# Altium PCB Main Control Board.PcbDoc
Units mil, origin at the board's own origin, x right, y up, seen from the top; angles counter-clockwise.
Board outline 1505 x 1885 mil, 2 copper layers (Top Layer, Bottom Layer); 17 components, 17 nets, 68 pads, 2 vias.
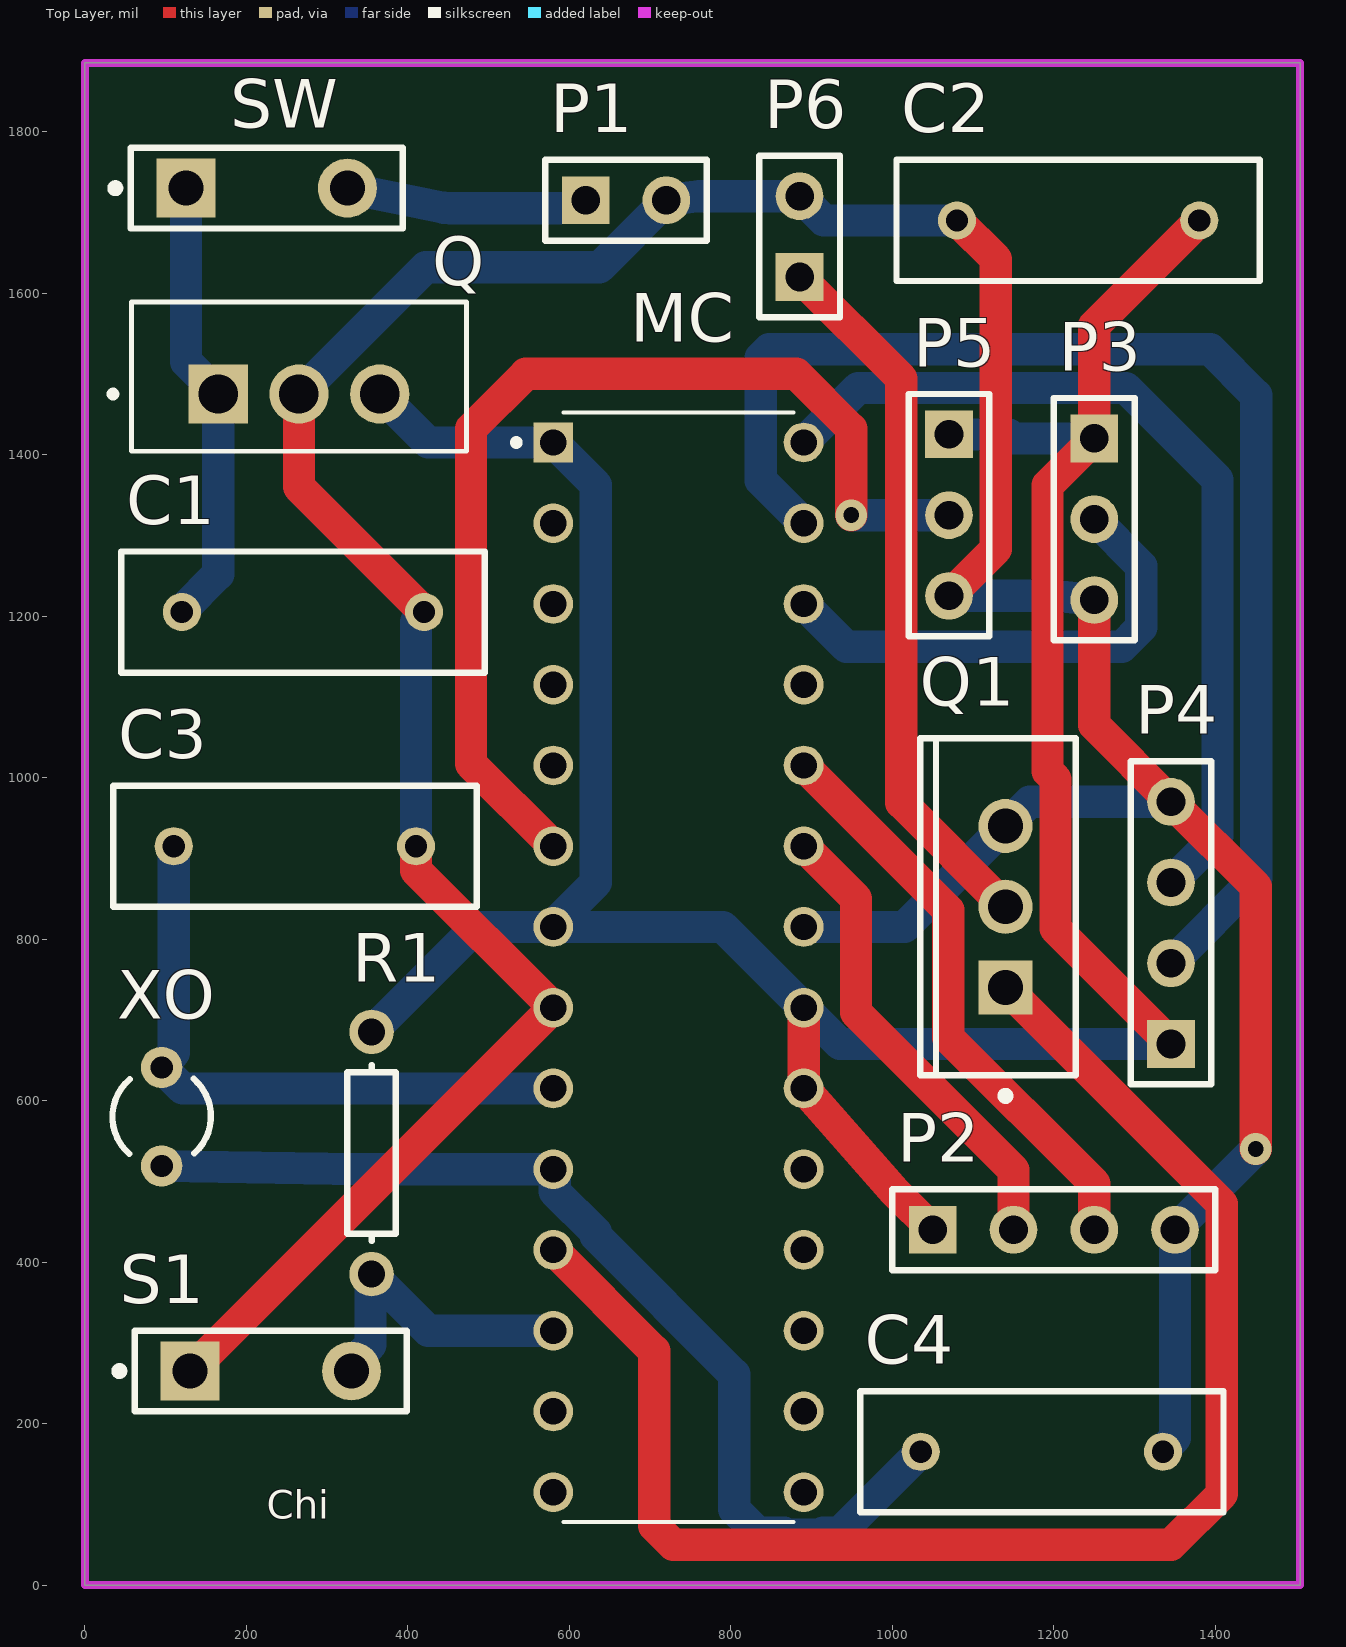
[diagram p0: Top Layer view]
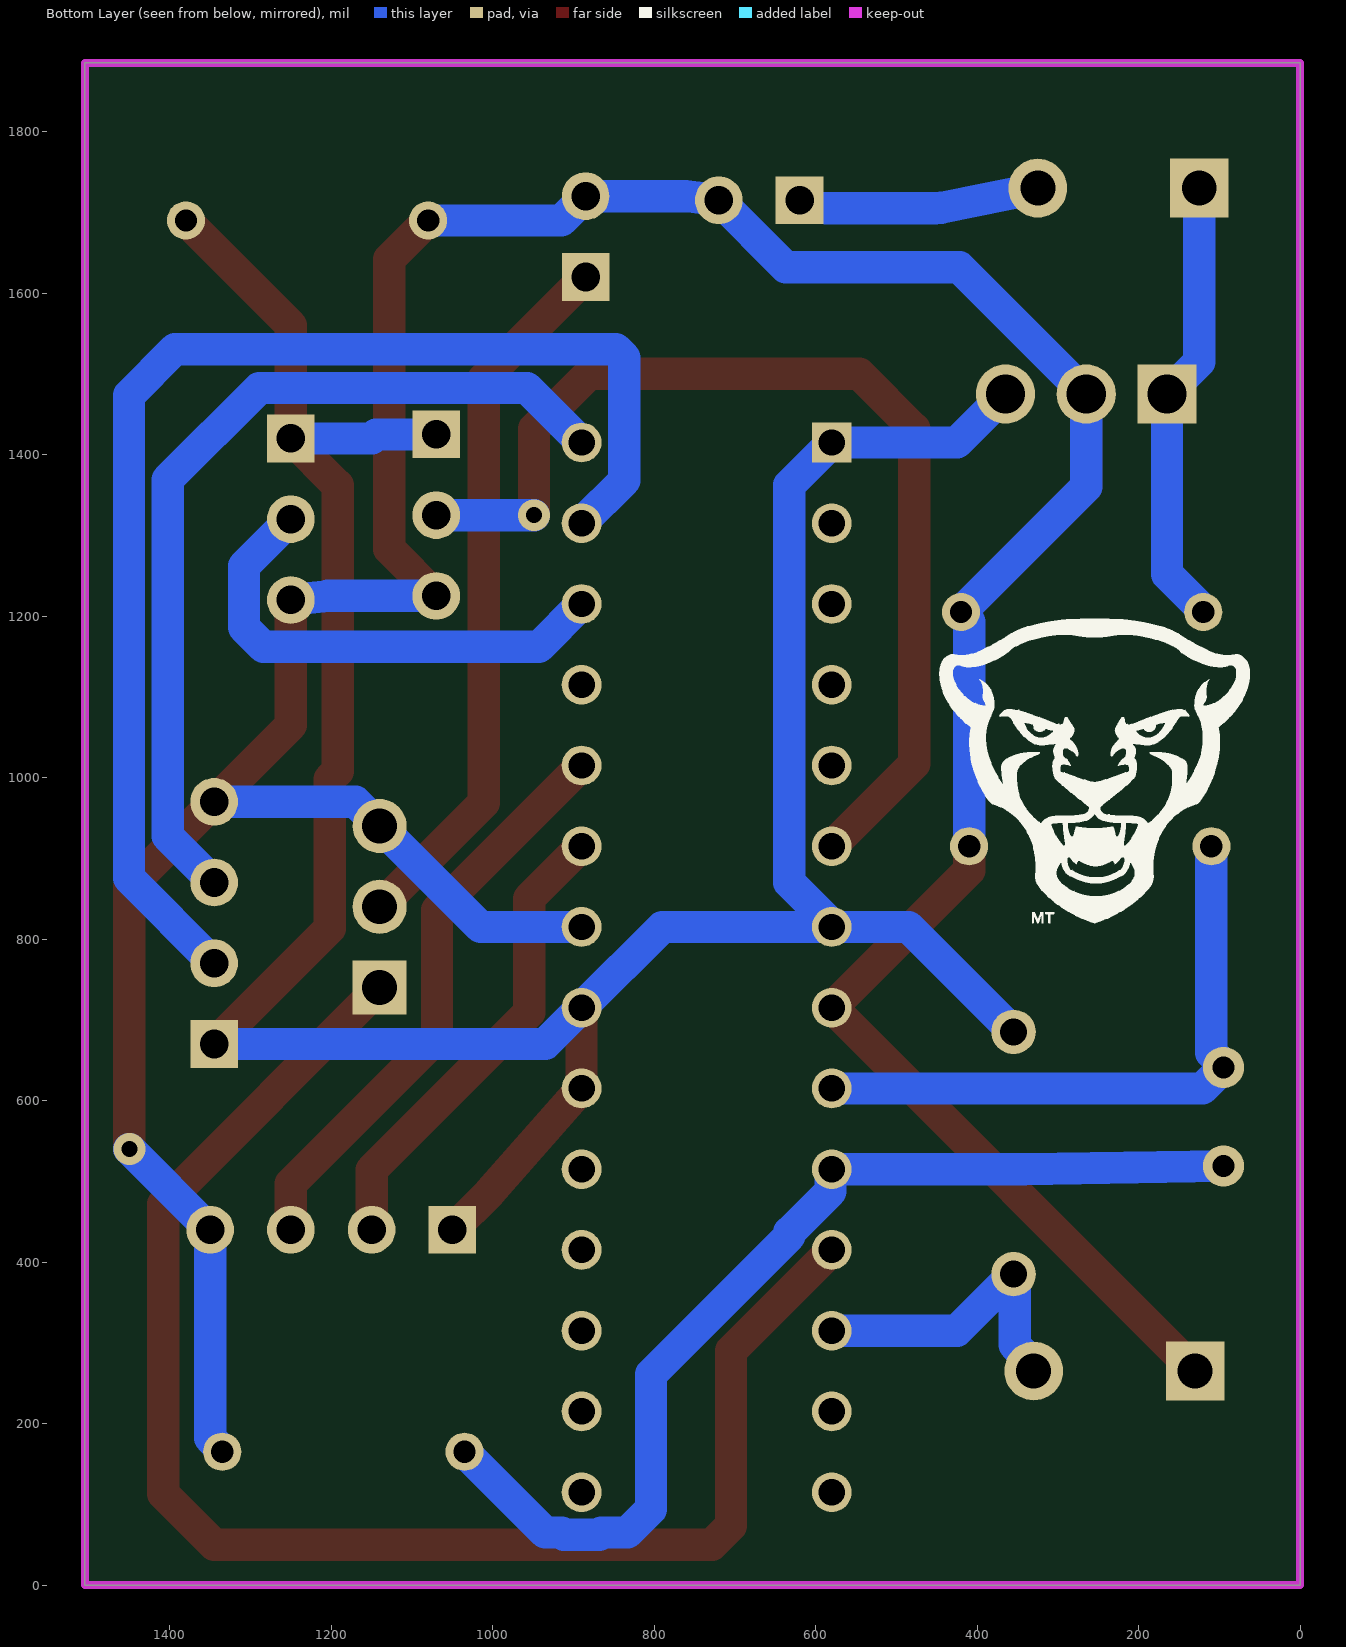
[diagram p1: Bottom Layer view, seen from below]

## Layer stack, top to bottom
Top Solder: solder mask 0.4, Solder Resist, Dk 3.5
Top Layer: signal copper 1.4
Dielectric 1: dielectric 12.6, FR-4, Dk 4.8
Bottom Layer: signal copper 1.4
Bottom Solder: solder mask 0.4, Solder Resist, Dk 3.5

## Board outline
0,0 1505,0 1505,1885 0,1885

## Design rules (kind name [scope] priority, off if disabled: settings)
BoardOutlineClearance [All] p1: gap=7.87 ignorepadtopadclearanceinfootprint=FALSE except(15.75: Arc-SplitBarrior Arc-SplitContinuation Track-SplitBarrior Track-SplitContinuation SMDPad-SplitBarrior SMDPad-SplitContinuation THPad-SplitBarrior THPad-SplitContinuation Via-SplitBarrior Via-SplitContinuation Fill-SplitBarrior Fill-SplitContinuation Poly-SplitBarrior Poly-SplitContinuation Region-SplitBarrior Region-SplitContinuation Text-SplitBarrior Text-SplitContinuation)
Clearance "Clearance Bottom Layer" [OnLayer('Bottom Layer')] p1: gap=8 ignorepadtopadclearanceinfootprint=TRUE except(10: Arc-Text Track-Text SMDPad-Text THPad-Text Via-Text Fill-Text Poly-Text Region-Text Text-Text)
Clearance "Clearance Top Layer" [OnLayer('Top Layer')] p2: gap=8 ignorepadtopadclearanceinfootprint=TRUE except(10: Arc-Text Track-Text SMDPad-Text THPad-Text Via-Text Fill-Text Poly-Text Region-Text Text-Text)
Clearance [All] p3: gap=7.87 ignorepadtopadclearanceinfootprint=FALSE except(3.5: Arc-Arc Arc-Track Arc-SMDPad Track-Track Track-SMDPad SMDPad-SMDPad; 5: Arc-Via Track-Via SMDPad-Via THPad-Via Via-Via; 10: Arc-Text Track-Text SMDPad-Text THPad-Text Via-Text Fill-Text Poly-Text Region-Text Text-Text)
HoleSize [All] p1: absolutevalues=TRUE maxlimit=248.03 minlimit=7.87 maxpercent=80.000 minpercent=20.000
MinimumAnnularRing [All] p1: minimumring=3
MinimumSolderMaskSliver [All] p1: minsoldermaskwidth=3.94
PolygonConnect PolygonConnect_1 [All] p1: thpad.connectstyle=Relief thpad.reliefconductorwidth=20 thpad.reliefentries=4 thpad.polygonreliefangle="90 Angle" thpad.airgapwidth=10 smdpad.connectstyle=Relief smdpad.reliefconductorwidth=20 smdpad.reliefentries=4 smdpad.polygonreliefangle="90 Angle" smdpad.airgapwidth=10 via.connectstyle=Direct via.reliefconductorwidth=20 via.reliefentries=4 via.polygonreliefangle="90 Angle" via.airgapwidth=10
RoutingCorners [All] p1: cornerstyle=Round minsetback=100 maxsetback=100
RoutingVias [All] p1: holewidth=19.68 width=39.37 viastyle="Through Hole" minholewidth=7.87 minwidth=17.72 maxholewidth=39.37 maxwidth=78.74
SilkToSilkClearance [All] p1: silktosilkclearance=3.94
SilkToSolderMaskClearance [IsPad] p1: minsilkscreentomaskgap=3.94 clearancetoexposedcopper=TRUE
SolderMaskExpansion [All] p1: expansion=4 istentingtop=FALSE
Width [All] p1: maxlimit=100 minlimit=3.5 preferedwidth=40 minimp=50.000000 maximp=50.000000 favimp=50.000000
25 further rules are at their usual default settings.

## Classes and differential pairs
component class "Main Control Board": C1 C2 C3 C4 MC P1 P2 P3 P4 P5 P6 Q Q1 S1 SW XO

## Components (designator, comment, footprint, x,y, rotation, side; value= is the part's Value field where it differs from the comment)
C1 "Cap" RAD-0.3 270,1205 r0 top value=100pF
C2 "Cap" RAD-0.3 1230,1690 r180 top value=100pF
C3 "Cap" RAD-0.3 260,915 r180 top value=100pF
C4 "Cap" RAD-0.3 1185,165 r180 top value=100pF
MC "ATMEGA328-PU" DIP787W46P254L3467H508Q28 735,765 r0 top
P1 "9V Power" HDR1X2 620,1715 r0 top
P2 "Nose" HDR1X4 1050,440 r0 top
P3 "Mic" HDR1X3 1250,1420 r270 top
P4 "LCD" HDR1X4 1345,670 r90 top
P5 "Lights" HDR1X3 1070,1425 r270 top
P6 "Speaker" HDR1X2 885,1620 r90 top
Q "LM7805CT/NOPB" TO254P1054X470X2600-3 165,1475 r0 top
Q1 "TIP120" ONSC-TO-220-3-221A-09 1140,840 r180 top
R1 "Res1" AXIAL-0.3 355,535 r90 top value=1K
S1 "SW-SPST" SPST-2 230,265 r0 top
SW "SW-SPST" SPST-2 225,1730 r0 top
XO "XTAL" R38 95,580 r180 top

## Footprints (in the part's own frame and the unit in brackets; to place one, negate y for a bottom-side part, rotate by r counter-clockwise, add the part's x,y. Pads: shape width x height; smd on the part's side, far side on the other; paste and mask are expansions set on the pad)
AXIAL-0.3 [mm] "Axial Device, Thru-Hole; 2 Leads; 0.3 in Pin Spacing"
  round 1.4 hole 0.85: 1(-3.81,0) 2(3.81,0)
  silkscreen extent -2.77,-0.76 2.77,0.76
DIP787W46P254L3467H508Q28 [mm]
  rect 1.25x1.25 hole 0.83: 1(-3.937,16.51)
  round 1.25 hole 0.83: 2(-3.937,13.97) 3(-3.937,11.43) 4(-3.937,8.89) 5(-3.937,6.35) 6(-3.937,3.81) 7(-3.937,1.27) 8(-3.937,-1.27) 9(-3.937,-3.81) 10(-3.937,-6.35) 11(-3.937,-8.89) 12(-3.937,-11.43) 13(-3.937,-13.97) 14(-3.937,-16.51) 15(3.937,-16.51) 16(3.937,-13.97) 17(3.937,-11.43) 18(3.937,-8.89) 19(3.937,-6.35) 20(3.937,-3.81) 21(3.937,-1.27) 22(3.937,1.27) 23(3.937,3.81) 24(3.937,6.35) 25(3.937,8.89) 26(3.937,11.43) 27(3.937,13.97) 28(3.937,16.51)
  silkscreen extent -5.2,-17.45 3.62,17.45, body extent -3.95,-17.34 3.95,17.34, height 4.57
HDR1X2 [mm] "Connector; Header; 2 Position"
  rect 1.5x1.5 hole 0.9: 1(0,0)
  round 1.5 hole 0.9: 2(2.54,0)
  silkscreen extent -1.27,-1.27 3.81,1.27
HDR1X3 [mm] "Connector; Header; 3 Position"
  rect 1.5x1.5 hole 0.9: 1(0,0)
  round 1.5 hole 0.9: 2(2.54,0) 3(5.08,0)
  silkscreen extent -1.27,-1.27 6.35,1.27
HDR1X4 [mm] "Connector; Header; 4 Position"
  rect 1.5x1.5 hole 0.9: 1(0,0)
  round 1.5 hole 0.9: 2(2.54,0) 3(5.08,0) 4(7.62,0)
  silkscreen extent -1.27,-1.27 8.89,1.27
ONSC-TO-220-3-221A-09 [mm] "FM, 3-Leads, Body 10.55x4.85mm, Pitch 2.54mm"
  rect 1.7x1.7 hole 1.1: 1(0,2.54)
  round 1.7 hole 1.1: 2(0,0) 3(0,-2.54)
  silkscreen extent -2.21,-5.3 2.68,6.07, body extent -2.19,-5.28 2.66,5.28, height 19.85
R38 [mm] "Crystal, Thru-Hole; 2 Leads; Body 3.1 x 8.2 mm (Dia.xH)"
  round 1.3 hole 0.7: 1(0,1.55) 2(0,-1.55)
  silkscreen extent -1.55,-1.19 1.55,1.17
RAD-0.3 [mm] "Radial Cap, Thru-Hole; 2 Leads; 0.3 in Pin Spacing"
  round 1.2 hole 0.7: 1(-3.81,0) 2(3.81,0)
  silkscreen extent -5.71,-1.91 5.71,1.91
SPST-2 [mm] "Switch; 2 Leads"
  rect 1.85x1.85 hole 1.1: 1(-2.54,0)
  round 1.85 hole 1.1: 2(2.54,0)
  silkscreen extent -4.89,-1.27 4.28,1.27
TO254P1054X470X2600-3 [mm]
  rect 1.86x1.86 hole 1.24: 1(0,0)
  round 1.86 hole 1.24: 2(2.54,0) 3(5.08,0)
  silkscreen extent -3.41,-1.8 7.81,2.9

## Part data
C1 C2 C3 C4: "Capacitor", LatestRevisionDate=17-Jul-2002, LatestRevisionNote="Re-released for DXP Platform.", PackageDescription="Radial Cap, Thru-Hole; 2 Leads; 0.3 in Pin Spacing", PackageReference=RAD-0.3, Published=8-Jun-2000, Publisher="Altium Limited"
MC: "AVR AVRÂ® ATmega Microcontroller IC 8-Bit 20MHz 32KB (16K x 16) FLASH 28-PDIP", Package="DIP-28 Microchip Technology", Availability="In Stock", Check_prices=https://www.snapeda.com/parts/ATMEGA328-PU/Microchip/view-part/?ref=eda, MF="Microchip Technology", MP=ATMEGA328-PU, Price=None, Purchase-URL=https://pricing.snapeda.com/search/part/ATMEGA328-PU/?ref=eda, SnapEDA_Link=https://www.snapeda.com/parts/ATMEGA328-PU/Microchip/view-part/?ref=snap
P1 P6: library part "Header 2", "Header, 2-Pin", LatestRevisionDate=17-Jul-2002, LatestRevisionNote="Re-released for DXP Platform.", Publisher="Altium Limited"
P2 P4: library part "Header 4", "Header, 4-Pin", LatestRevisionDate=17-Jul-2002, LatestRevisionNote="Re-released for DXP Platform.", Publisher="Altium Limited"
P3 P5: library part "Header 3", "Header, 3-Pin", LatestRevisionDate=17-Jul-2002, LatestRevisionNote="Re-released for DXP Platform.", Publisher="Altium Limited"
Q: "Linear Voltage Regulator IC 1 Output 1A TO-220-3", Package="TO-220 ON Semiconductor", Availability=Unavailable, MF="ON Semiconductor", MP=LM7805CT, Price=None, SnapEDA_Link=https://www.snapeda.com/parts/LM7805CT/ON%20Semiconductor/view-part/546231/?ref=snap
Q1: library part CMP-013-00001-2, "Plastic Medium-Power Complementary Silicon Transistor, 60 V VCEO, -65 to 150 degC, 3-Pin TO-220, RoHS, Tube", Case/Package=TO-220-3, Manufacturer="ON Semiconductor", Max Operating Temperature=150°C, Min Operating Temperature=-65°C, Package Description="3-Pin Flange Mount, Vertical Straight Lead, Body 10.095 x 4.45 mm, Pitch 2.54 mm", Package Quantity=50, Package Reference=TO-220-3-221A-09, Package Version="Rev. AH, 08/2014", Datasheet URL=http://www.onsemi.cn/pub_link/Collateral/TIP120-D.PDF, Datasheet Version="Rev. 9, 11/2014", hFE Min=1000, Mounting Technology=TH, Packaging=Rail/Tube, Pins=3, RoHS Compliant=True, Vce Max=4V
R1: "Resistor", LatestRevisionDate=17-Jul-2002, LatestRevisionNote="Re-released for DXP Platform.", PackageDescription="Axial Device, Thru-Hole; 2 Leads; 0.3 in Pin Spacing", PackageReference=AXIAL-0.3, Published=8-Jun-2000, Publisher="Altium Limited"
S1 SW: "Single-Pole, Single-Throw Switch", LatestRevisionDate=17-Jul-2002, LatestRevisionNote="Re-released for DXP Platform.", PackageDescription="Switch; 2 Leads", PackageReference=SPST-2, Published=24-Mar-1999, Publisher="Altium Limited"
XO: "Crystal Oscillator", LatestRevisionDate=17-Jul-2002, LatestRevisionNote="Re-released for DXP Platform.", PackageDescription="Crystal, Thru-Hole; 2 Leads; Body 3.1 x 8.2 mm (Dia.xH)", PackageReference=R38, Published=8-Jun-2000, Publisher="Altium Limited"

## Via types
v1: diameter 39.37, hole 19.68, Top Layer to Bottom Layer, 2 vias

## Nets (pads, with @x,y where several pads share a name; then routed paths per layer and width w, separated by ;. In a path a pad name is that pad's centre, name@x,y a point inside that pad or via, vN(x,y) a via of type N, cw(c..) or ccw(c..) an arc to the next point about the centre after c; other vN are vias at no path point)
GND: C1.2 C2.2 C3.1 C4.1 MC.8 MC.22 P1.2 P2.4 P3.3 P4.4 P5.3 P6.2 Q1.3 Q.2 S1.1 | length 5190.4
  Top Layer w40: S1.1 MC.8 410,885 C3.1 ; Q.2 265,1360 C1.2 ; P5.3 1128,1283 1128,1642 C2.2 ; P3.3 1250,1065 P4.4 1450,865 v1(1450,540)
  Bottom Layer w40: C3.1 410,1193.04 420,1203.04 C1.2 265,1360 Q.2 422,1632 637,1632 P1.2 761,1720 P6.2 915,1690 C2.2 ; MC.22 1015,815 Q1.3 1170,970 P4.4 ; P5.3 1204,1225 P3.3 ; C4.1 1335,166.96 1350,181.96 P2.4 v1(1450,540)
NetSW_1: C1.1 Q.1 SW.1 | length 560.2
  Bottom Layer w40: C1.1 120,1206.96 165,1251.96 Q.1 125,1515 SW.1
NetSW_2: P1.1 SW.2 | length 301.6
  Bottom Layer w40: SW.2 444.4,1705.8 452.35,1705 587.04,1705 587.51,1705.47 610.47,1705.47 P1.1
NetC2_1: C2.1 MC.1 MC.7 MC.20 MC.21 P2.1 P3.1 P4.1 P5.1 Q.3 R1.2 | length 3667.9
  Top Layer w40: MC.21 MC.20 1003,487 P2.1 ; P4.1 1202,813 1202,998 1192,1008 1192,1362 P3.1 1250,1560 C2.1
  Bottom Layer w40: R1.2 485,815 MC.7 ; Q.3 425,1415 MC.1 632.61,1362.39 632.61,870.1 580,817.49 MC.7 ; P5.1 1144.47,1425 1149.47,1420 P3.1 ; P4.1 935,670 MC.21 790,815 MC.7
NetC3_2: C3.2 MC.9 XO.2 | length 776
  Bottom Layer w40: C3.2 110,659.05 95,644.05 XO.2 121.02,615 MC.9
NetC4_2: C4.2 MC.10 XO.1 | length 1285.4
  Bottom Layer w40: XO.1 341.98,515 MC.10 581.76,513.24 581.76,487.63 632.61,436.79 632.61,432.39 804,261 804,94 833,65 865.6,65 868.21,62.39 911.79,62.39 914.4,65 935,65 C4.2
NetConnector_1: 
NetConnector_2: 
NetMC_6: MC.6 P5.2 | length 1314.6
  Top Layer w40: MC.6 478,1017 478,1432 546,1500 881,1500 949,1432 v1(949,1325)
  Bottom Layer w40: v1(949,1325) P5.2
NetMC_11: MC.11 Q1.1 | length 1870.2
  Top Layer w40: MC.11 705,290 705,73.43 728.43,50 1345,50 1408,113 1408,472 Q1.1
NetMC_12: MC.12 R1.1 S1.2 | length 384.4
  Bottom Layer w40: S1.2 330,273.89 353.56,297.44 353.56,383.56 R1.1 425,315 MC.12
NetMC_23: MC.23 P2.2 | length 582.7
  Top Layer w40: MC.23 954.92,850.08 954.92,709.08 1150,514 P2.2
NetMC_24: MC.24 P2.3 | length 724.1
  Top Layer w40: MC.24 1069,836 1069,678 1250,497 P2.3
NetMC_26: MC.26 P3.2 | length 607.9
  Bottom Layer w40: MC.26 943,1162 1284,1162 1308,1186 1308,1262 P3.2
NetMC_27: MC.27 P4.2 | length 1615.7
  Bottom Layer w40: MC.27 837,1368 837,1520 847.53,1530.53 1393.48,1530.53 1450.53,1473.48 1450.53,875.53 P4.2
NetMC_28: MC.28 P4.3 | length 1110.4
  Bottom Layer w40: MC.28 957.53,1482.53 1289,1482.53 1402.53,1369 1402.53,927.53 P4.3
NetP6_1: P6.1 Q1.2 | length 885.6
  Top Layer w40: P6.1 1011,1494 1011,969 Q1.2
pads on no net: MC.2 MC.3 MC.4 MC.5 MC.13 MC.14 MC.15 MC.16 MC.17 MC.18 MC.19 MC.25

## Keep-outs
Keep-Out Layer:
  the board outline again, w10

## Silkscreen, mask and mechanical layers (free items; w line width, h text height)
Top Overlay:
  text "Chi" at 225,70 h60
Bottom Overlay:
  drawing of 3 lines, arcs and shapes, not listed